# Altium PCB PCB1.PcbDoc
Units mm, origin at the board's own origin, x right, y up, seen from the top; angles counter-clockwise.
Board outline 110 x 60 mm, 2 copper layers (Top Layer, Bottom Layer); 11 components, 10 nets, 81 pads, 0 vias.
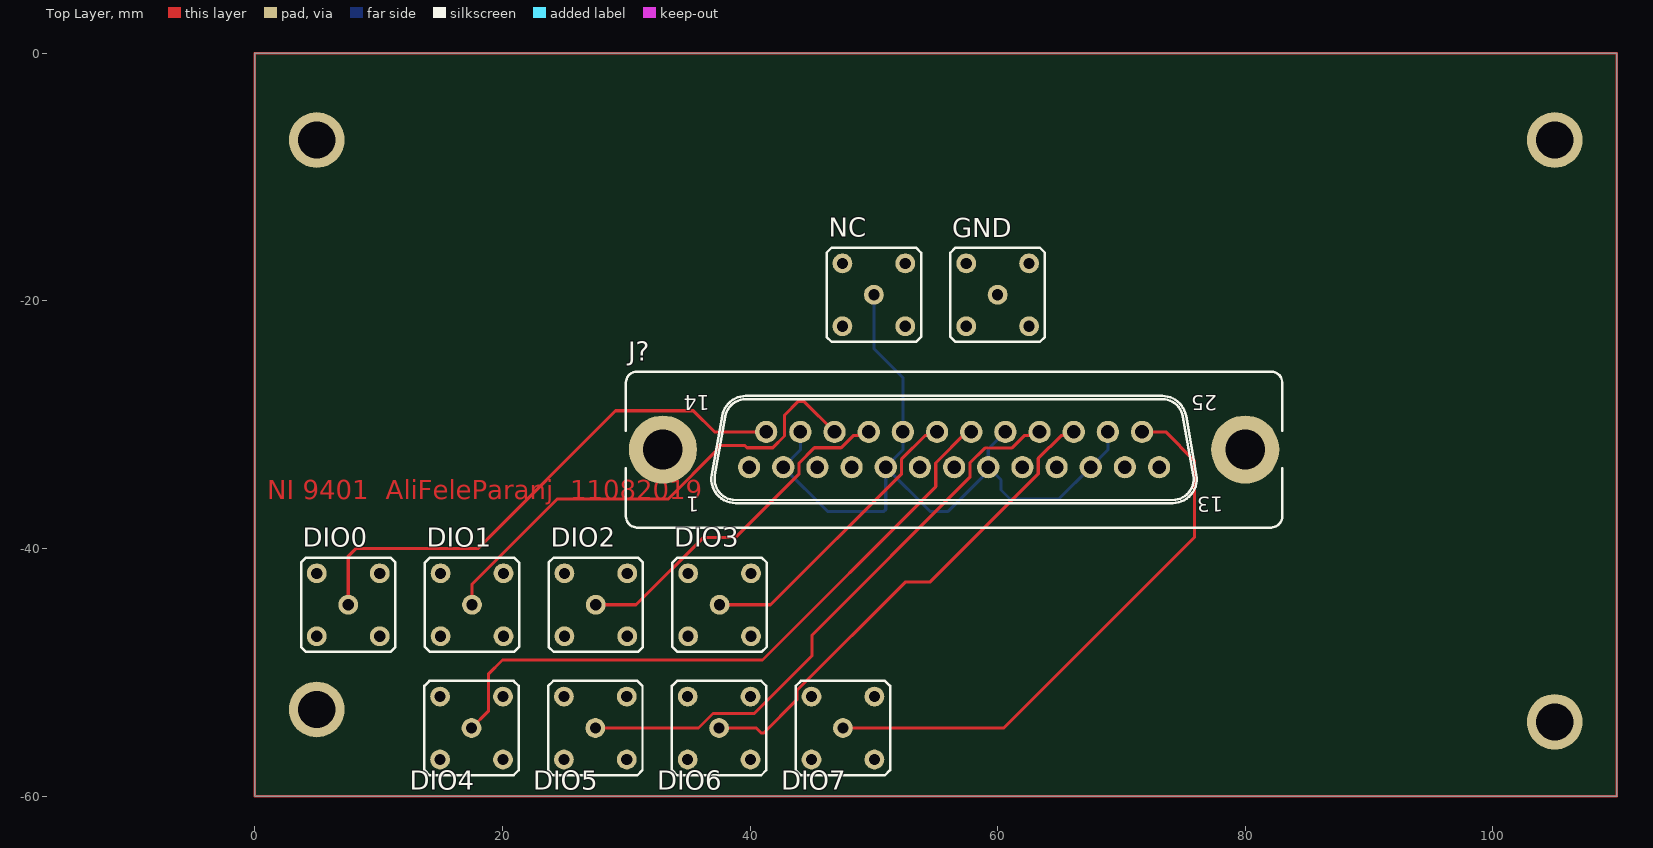
[diagram p0: Top Layer view]
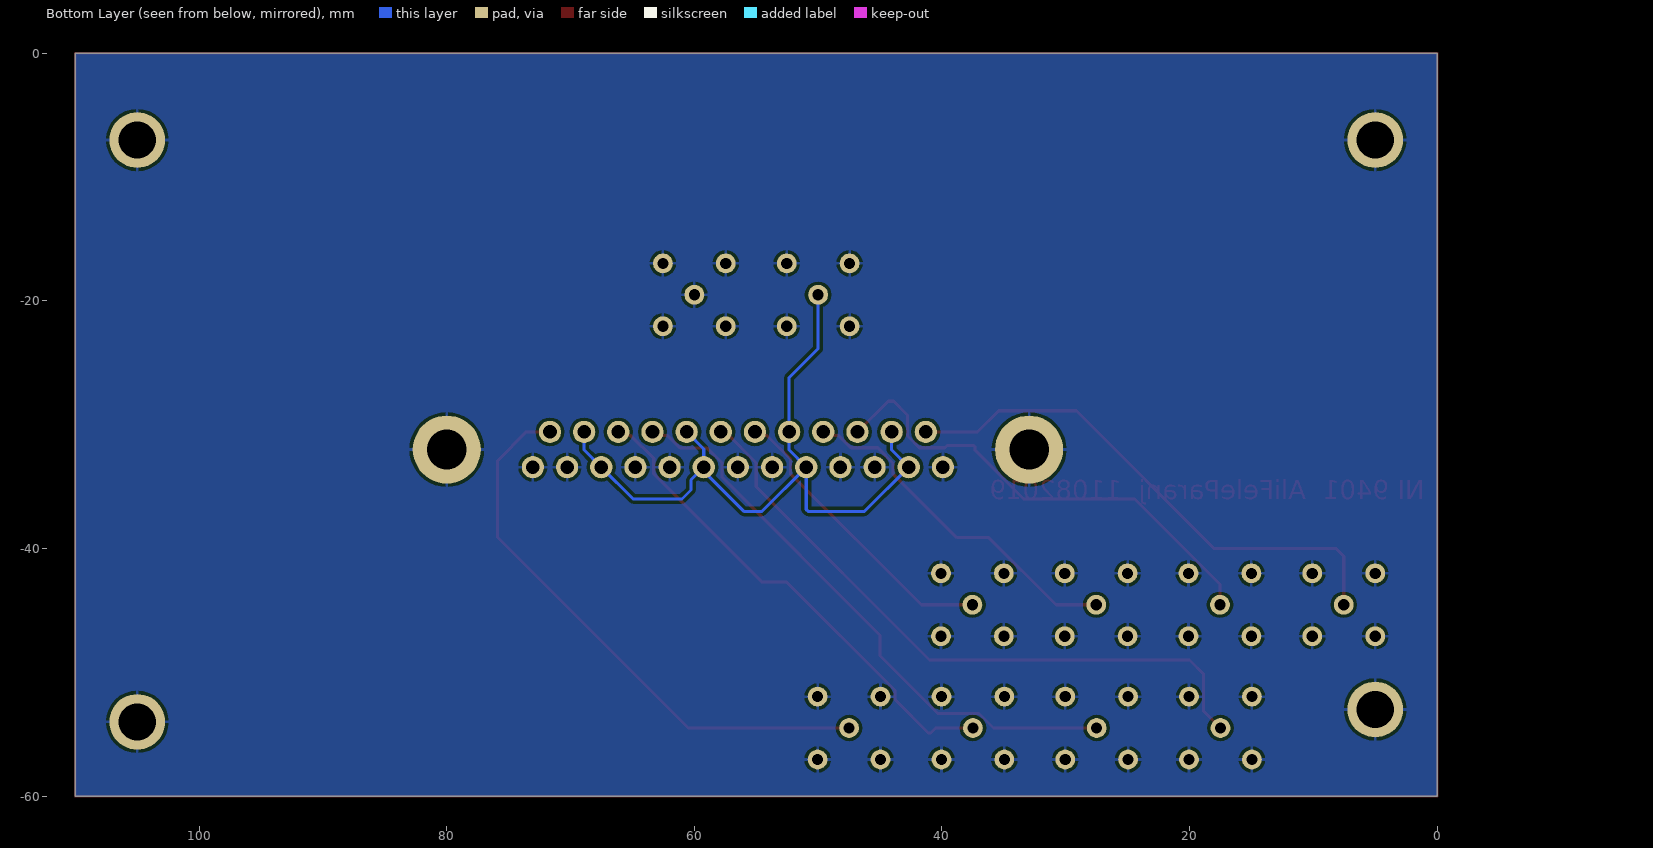
[diagram p1: Bottom Layer view, seen from below]
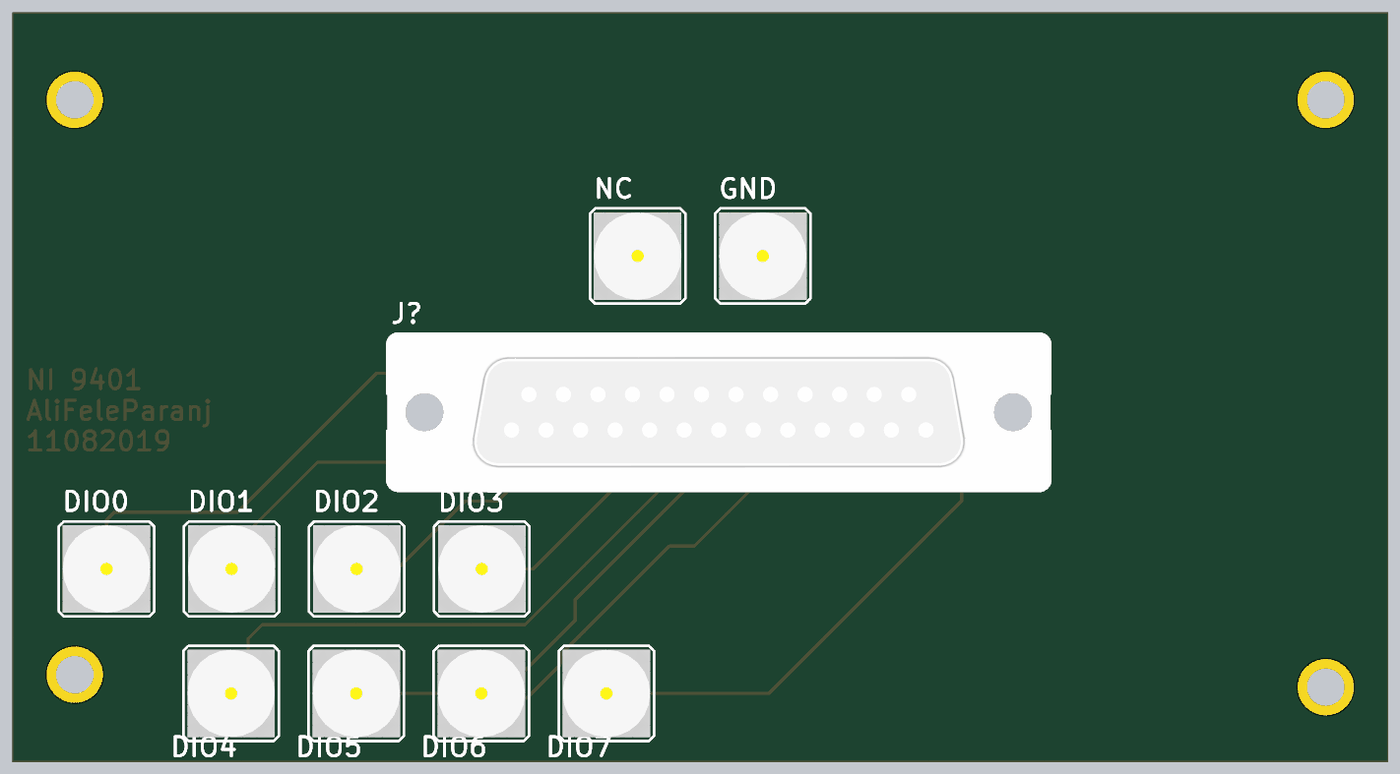
[diagram p2: 3D render of the assembled board from above, using the file's embedded part models]

## Layer stack, top to bottom
Top Solder: solder mask 0.0102, Solder Resist, Dk 3.5
Top Layer: signal copper 0.0356
Dielectric 1: dielectric 0.32, FR-4, Dk 4.8
Bottom Layer: signal copper 0.0356
Bottom Solder: solder mask 0.0102, Solder Resist, Dk 3.5

## Board outline
0,-60 110,-60 110,-44 110,-14 110,0 0,0

## Design rules (kind name [scope] priority, off if disabled: settings)
Clearance [All] p1: gap=0.254 ignorepadtopadclearanceinfootprint=FALSE except(0: Arc-Hole Track-Hole SMDPad-Hole THPad-Hole Via-Hole Fill-Hole Poly-Hole Region-Hole Text-Hole)
PolygonConnect [All] p1: connectstyle=Relief reliefconductorwidth=0.254 reliefentries=4 polygonreliefangle="90 Angle" airgapwidth=0.254
RoutingLayers "Schematic Routing Layers" [InNet('GND')] p1: top layer_v5=FALSE bottom layer_v5=TRUE
RoutingLayers [All] p2: top layer_v5=TRUE bottom layer_v5=TRUE
RoutingVias [All] p1: holewidth=0.711 width=1.27 viastyle="Through Hole" minholewidth=0.711 minwidth=1.27 maxholewidth=0.711 maxwidth=1.27
SolderMaskExpansion [All] p1: expansion=0.102
Width [All] p1: maxlimit=0.254 minlimit=0.254 preferedwidth=0.254
29 further rules are at their usual default settings.

## Components (designator, comment, footprint, x,y, rotation, side; value= is the part's Value field where it differs from the comment)
DIO0 "LEMO 00" LEMO_EPA.00.250.NTN 7.54,-44.54 r0 top
DIO1 "LEMO 00" LEMO_EPA.00.250.NTN 17.54,-44.54 r0 top
DIO2 "LEMO 00" LEMO_EPA.00.250.NTN 27.54,-44.54 r0 top
DIO3 "LEMO 00" LEMO_EPA.00.250.NTN 37.54,-44.54 r0 top
DIO4 "LEMO 00" LEMO_EPA.00.250.NTN 17.5,-54.5 r0 top
DIO5 "LEMO 00" LEMO_EPA.00.250.NTN 27.5,-54.5 r0 top
DIO6 "LEMO 00" LEMO_EPA.00.250.NTN 37.5,-54.5 r0 top
DIO7 "LEMO 00" LEMO_EPA.00.250.NTN 47.5,-54.5 r0 top
GND "LEMO 00" LEMO_EPA.00.250.NTN 60,-19.5 r0 top
J? "D-SUB25F" NORCOMP_172-025-242R011 56.48,-32 r180 top
NC "LEMO 00" LEMO_EPA.00.250.NTN 50,-19.5 r0 top

## Footprints (in the part's own frame and the unit in brackets; to place one, negate y for a bottom-side part, rotate by r counter-clockwise, add the part's x,y. Pads: shape width x height; smd on the part's side, far side on the other; paste and mask are expansions set on the pad)
LEMO_EPA.00.250.NTN [mm] "50 Ohm size 00 Coaxial Straight socket"
  round 1.6 hole 0.9: 1(0,0) 2(-2.54,-2.54) 2(-2.54,2.54) 2(2.54,-2.54) 2(2.54,2.54)
  silkscreen extent -3.81,-3.81 3.81,3.81, body extent -3.5,-3.5 3.5,3.5, height 14
NORCOMP_172-025-242R011 [mm] "Straight Wire Wrap D-Sub 25 Contacts Female Connector"
  round 1.8 hole 1.1: 1(16.561,1.422) 2(13.801,1.422) 3(11.041,1.422) 4(8.281,1.422) 5(5.52,1.422) 6(2.76,1.422) 7(0,1.422) 8(-2.76,1.422) 9(-5.52,1.422) 10(-8.281,1.422) 11(-11.041,1.422) 12(-13.801,1.422) 13(-16.561,1.422) 14(15.177,-1.422) 15(12.417,-1.422) 16(9.657,-1.422) 17(6.896,-1.422) 18(4.136,-1.422) 19(1.376,-1.422) 20(-1.384,-1.422) 21(-4.145,-1.422) 22(-6.905,-1.422) 23(-9.665,-1.422) 24(-12.425,-1.422) 25(-15.185,-1.422)
  round 5.5 hole 3.2: 26(-23.519,0) 27(23.52,0)
  silkscreen extent -26.5,-6.3 26.51,6.3, body extent -26.5,-6.3 26.51,6.3, height 11.9

## Part data
DIO0 DIO1 DIO2 DIO3 DIO4 DIO5 DIO6 DIO7 GND NC: library part LEMO_EPA.00.250.NTN, Manufacturer=LEMO, Manufacturer Part Number=EPA.00.250.NTN, Author="CERN DEM JLC", ComponentHeight=14mm, Component Type=Standard, CreateDate=22/04/2008, Family="LEMO 00", HelpURL=\\cern.ch\dfs\Applications\Altium\Datasheets\LEMO_EPA.00.250.NTN.pdf, LatestRevisionDate=22/04/2008, Mounted=Yes, Part Description="Size 00, 50 Ohms Coaxial Straight socket", Part Number=LEMO_EPA.00.250.NTN, Pin Count=2, PressFit=No, SCEM=09.46.11.184.2, Sense=No, SMD=No, Socket=No, Status=None
J?: library part NORCOMP_172-025-242R011, "Connector D-sub 25 Female", Manufacturer=NORCOMP, Manufacturer Part Number=172-025-242R011, Author="CERN DEM JLC", ComponentHeight=12.08mm, Component Type=Standard, CreateDate=13/06/2013, Family=D-SUB25F, HelpURL=\\cern.ch\dfs\Applications\Altium\Datasheets\NORCOMP_172-025-242R011.pdf, LatestRevisionDate=13/06/2013, Mounted=Yes, Part Description="Straight Wire Wrap D-Sub 25 Contacts Female Connector With 0.065\"Clinch Nut (Board Side)", Part Number=NORCOMP_172-025-242R011, Pin Count=27, PressFit=No, Sense=No, SMD=No, Socket=No, Status=None

## Free pads (board coordinates)
  round 4.5 hole 3: 12(5,-53) 12(5,-7) 12(105,-54) 12(105,-7)

## Nets (pads, with @x,y where several pads share a name; then routed paths per layer and width w, separated by ;. In a path a pad name is that pad's centre, name@x,y a point inside that pad or via, vN(x,y) a via of type N, cw(c..) or ccw(c..) an arc to the next point about the centre after c; other vN are vias at no path point)
\: J?.2 J?.5 J?.8 J?.11 J?.15 J?.18 J?.21 J?.24 NC.1 | length 61.3
  Bottom Layer w0.254: J?.15 44.064,-32.038 J?.2 46.257,-37 50.811,-37 50.96,-36.851 J?.5 ; NC.1 50,-23.84 52.344,-26.184 J?.18 52.344,-32.038 J?.5 ; J?.21 59.241,-31.962 J?.8 ; J?.24 68.906,-32.038 J?.11 64.944,-36 61,-36 60.268,-35.268 60.268,-34.45 J?.8 ; J?.5 54.538,-37 56,-37 59.241,-33.759 J?.8
DIO0: DIO0.1 J?.14 | length 43.3
  Top Layer w0.254: DIO0.1 7.54,-40.609 8.149,-40 18,-40 29.131,-28.869 35.42,-28.869 37.128,-30.578 J?.14
DIO1: DIO1.1 J?.16 | length 39.4
  Top Layer w0.254: DIO1.1 17.54,-42.87 24.41,-36 33.388,-36 37.321,-32.066 37.321,-31.809 37.47,-31.66 39.553,-31.66 39.751,-31.859 41.834,-31.859 42.783,-30.91 42.783,-29.217 43.895,-28.105 44.352,-28.105 J?.16
DIO2: DIO2.1 J?.17 | length 28.3
  Top Layer w0.254: DIO2.1 30.79,-44.54 36.212,-39.118 38.796,-39.118 43.96,-33.953 43.96,-33.09 45.192,-31.859 47.355,-31.859 48.34,-30.873 49.288,-30.873 J?.17
DIO3: DIO3.1 J?.19 | length 24
  Top Layer w0.254: DIO3.1 41.654,-44.54 52.241,-33.953 52.241,-32.759 54.127,-30.873 54.809,-30.873 J?.19
DIO4: DIO4.1 J?.20 | length 53.1
  Top Layer w0.254: DIO4.1 18.859,-53.141 18.859,-50.141 20,-49 41,-49 55.001,-34.999 55.001,-33.09 57.514,-30.578 J?.20
DIO5: DIO5.1 J?.22 | length 47.4
  Top Layer w0.254: DIO5.1 35.83,-54.5 37.011,-53.319 40.351,-53.319 45,-48.67 45,-47 57.761,-34.238 57.761,-33.09 58.969,-31.883 61.132,-31.883 62.141,-30.873 63.089,-30.873 J?.22
DIO6: DIO6.1 J?.23 | length 40
  Top Layer w0.254: DIO6.1 40.5,-54.5 40.895,-54.895 41.105,-54.895 43.779,-52.221 43.779,-51.471 52.538,-42.712 54.523,-42.712 63.282,-33.953 63.282,-32.718 65.127,-30.873 65.85,-30.873 J?.23
DIO7: DIO7.1 J?.25 | length 46.2
  Top Layer w0.254: DIO7.1 60.5,-54.5 75.895,-39.105 75.895,-32.895 73.578,-30.578 J?.25
GND: DIO0.2 DIO1.2 DIO2.2 DIO3.2 DIO4.2 DIO5.2 DIO6.2 DIO7.2 GND.1 GND.2 J?.1 J?.3 J?.4 J?.6 J?.7 J?.9 J?.10 J?.12 J?.13 J?.26 J?.27 NC.2 pad.12
copper on no net: | length 340
  Top Layer w0.2: 0,-60 0,0 110,0 110,-14 110,-44 110,-60 0,-60

## Polygon pours and split planes (outlines as drawn)
GND on Bottom Layer "gnd" (solid, remove dead copper, pour order 44): 0,0 110,0 110,-60 0,-60
GND on Bottom Layer "Bottom Layer-GND 1" (solid, pour order 32): -10,-19
GND on Bottom Layer "Bottom Layer-GND 2" (solid, pour order 18): -3.25,-1.25

## Other copper
Top Layer:
  text "NI 9401  AliFeleParanj  11082019" at 1,-36 h1.52
Bottom Layer:
  region net GND: -14.5,-58.625

## Text inside footprints (layer, text, board x,y; h text height)
J?: Top Overlay "14" at 36.731,-27.6 h1.2 r180; Top Overlay "13" at 78.231,-35.8 h1.2 r180; Top Overlay "25" at 77.731,-27.6 h1.2 r180; Top Overlay "1" at 35.881,-35.8 h1.2 r180; Mechanical 14 "1" at 35.88,-35.8 h1.2 r180; Mechanical 14 "25" at 77.73,-27.6 h1.2 r180; Mechanical 14 "13" at 78.23,-35.8 h1.2 r180; Mechanical 14 "14" at 36.73,-27.6 h1.2 r180